# Altium PCB FDDplus3.PcbDoc
Units mm, origin at the board's own origin, x right, y up, seen from the top; angles counter-clockwise.
Board outline 101.85 x 73.66 mm, 2 copper layers (Top, Bottom), stack 1.67 mm thick; 38 components, 96 nets, 309 pads, 29 vias.
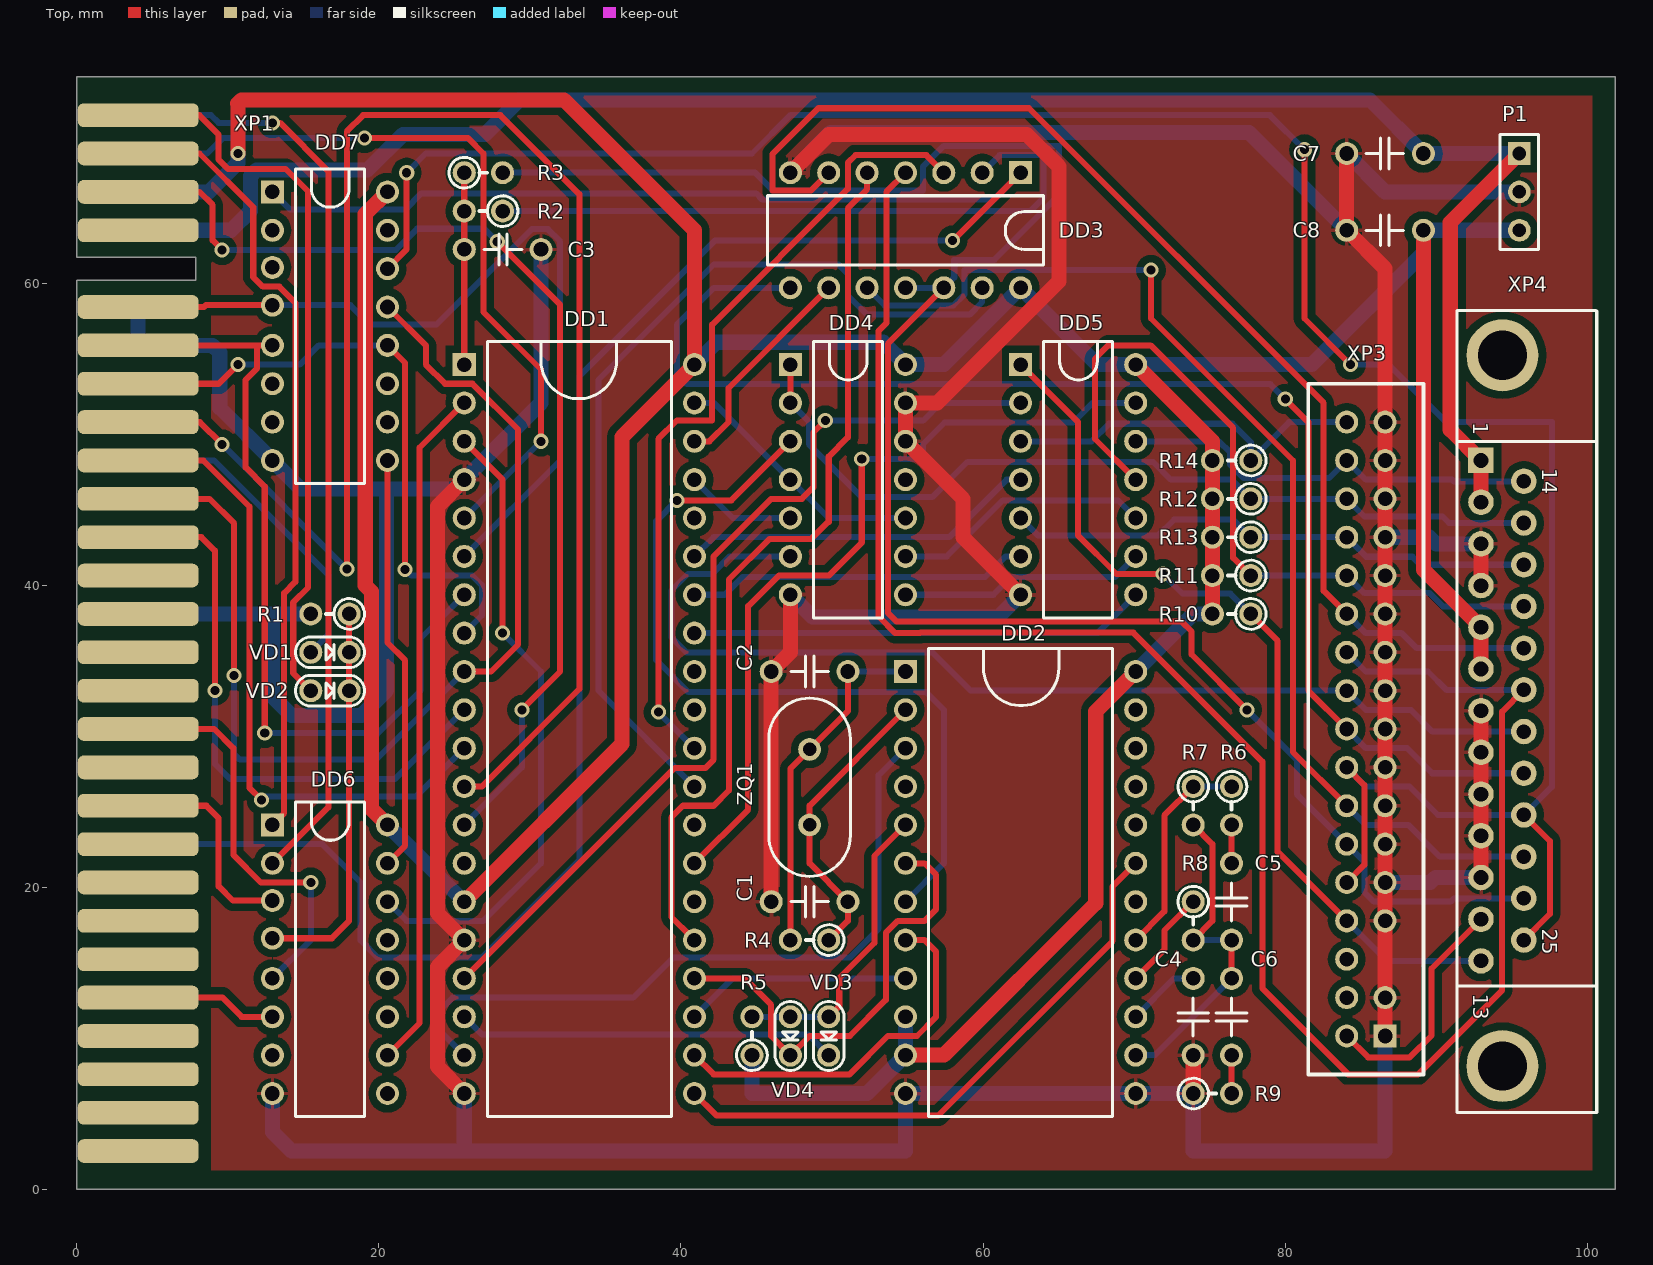
[diagram p0: Top view]
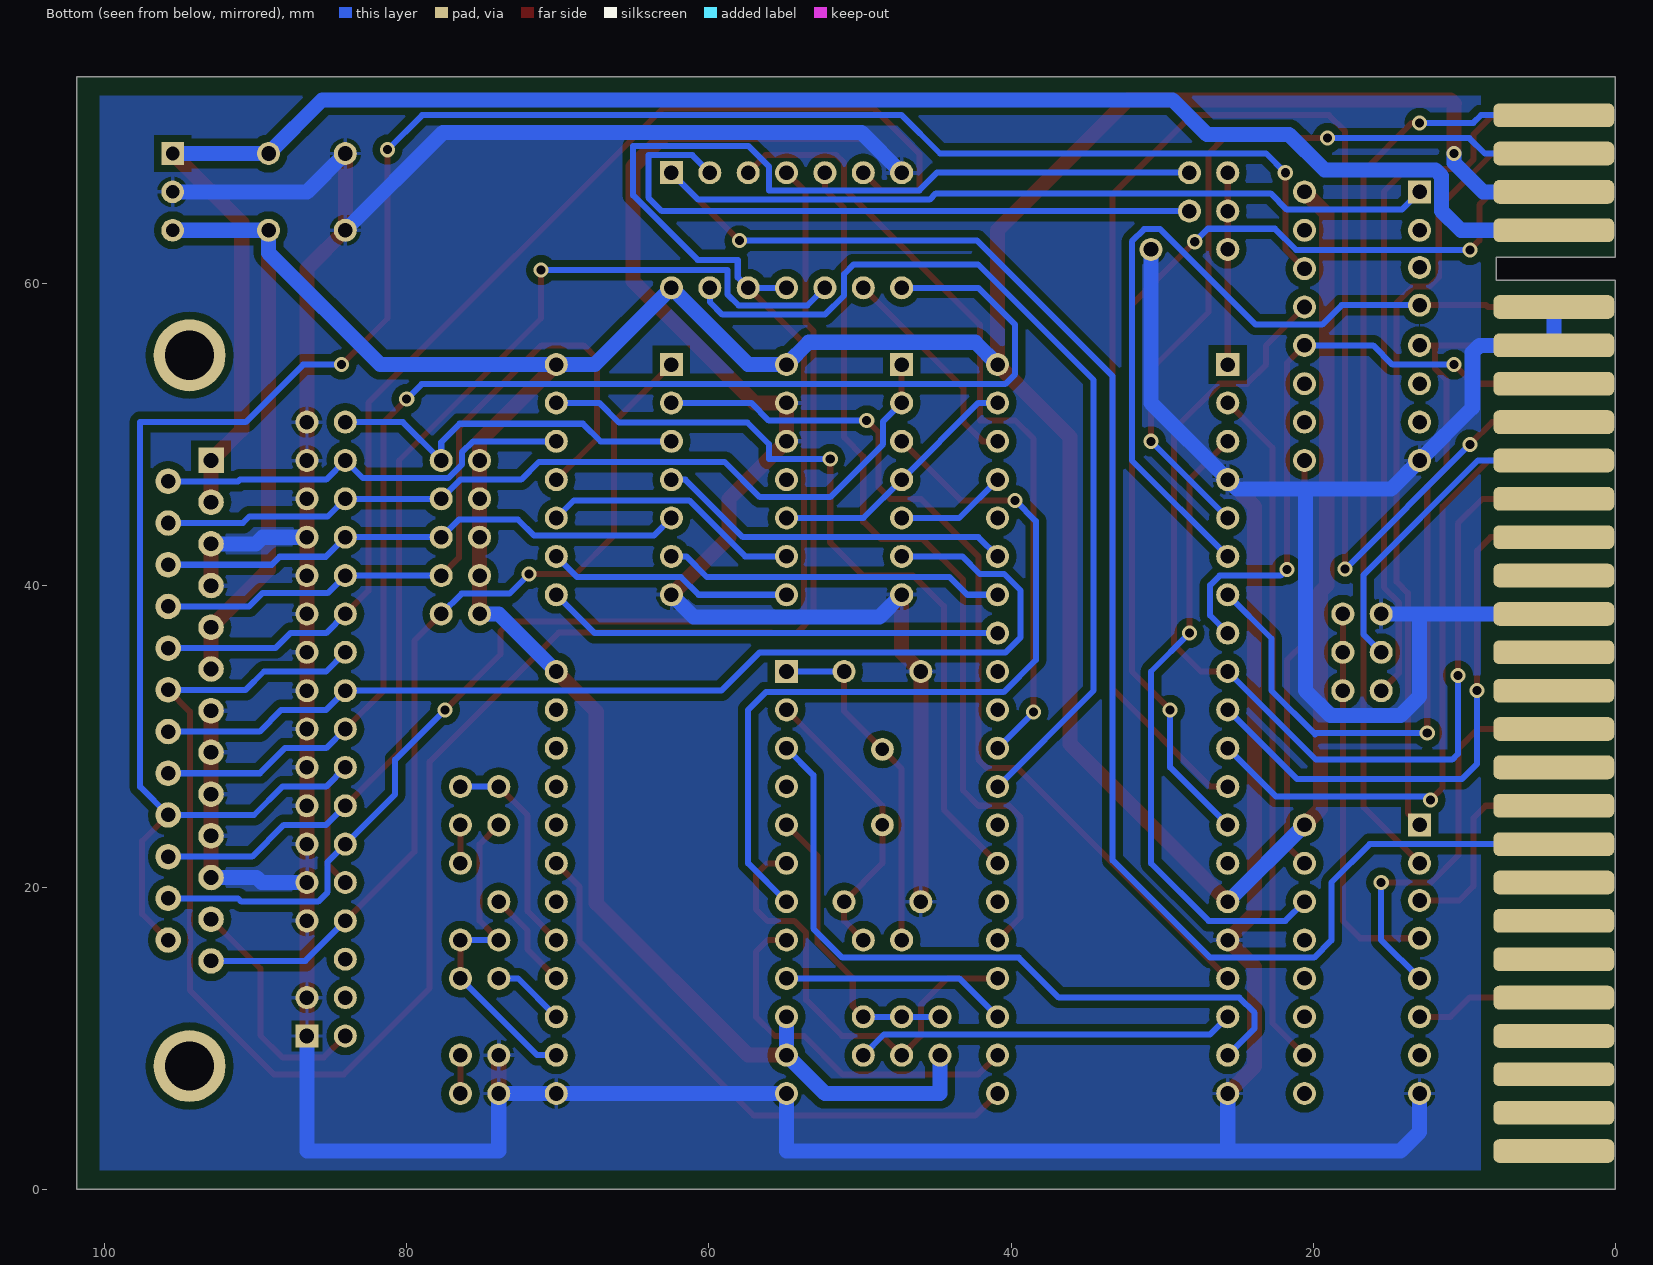
[diagram p1: Bottom view, seen from below]

## Layer stack, top to bottom
Top Solder: solder mask 0.01, Solder Resist, Dk 3.5
Top: signal copper 0.035
Dielectric 1: dielectric 1.6, FR-4, Dk 4.8
Bottom: signal copper 0.035
Bottom Solder: solder mask 0.01, Solder Resist, Dk 3.5

## Board outline
0,0 101.854,0 101.854,73.66 0,73.66 0,61.722 7.874,61.722 7.874,60.198 0,60.198

## Design rules (kind name [scope] priority, off if disabled: settings)
Clearance [All] p1: gap=0.2 except(0.5: Arc-Poly Track-Poly SMDPad-Poly THPad-Poly Via-Poly Fill-Poly Poly-Poly)
ComponentClearance DG126 [HasFootprint('DG126') vs HasFootprint('DG126')] p1: gap=-1 collisioncheckmode=3 verticalgap=0.2 showdistances=FALSE
ComponentClearance [All] p2: gap=0.3 collisioncheckmode=3 verticalgap=0.2 showdistances=FALSE
HoleSize [All] p1: absolutevalues=TRUE maxlimit=6.3 minlimit=0.2 maxpercent=80.000 minpercent=20.000
HoleToHoleClearance [All] p1: gap=0.4 allowstackedmicrovias=TRUE
MinimumSolderMaskSliver [All] p1: minsoldermaskwidth=0.1
PlaneConnect Via_Plane_Connect [(ObjectKind = 'Via')] p1: planeconnectstyle=Direct reliefexpansion=0.508 reliefentries=4 reliefconductorwidth=0.254 reliefairgap=0.254
PlaneConnect [All] p2: planeconnectstyle=Relief reliefexpansion=0.508 reliefentries=4 reliefconductorwidth=0.254 reliefairgap=0.254
PolygonConnect Via_Poly_Connect [(ObjectKind = 'Via')] p1: connectstyle=Direct reliefconductorwidth=0.254 reliefentries=4 polygonreliefangle="90 Angle" airgapwidth=0.254
PolygonConnect [All] p2: connectstyle=Relief reliefconductorwidth=0.254 reliefentries=4 polygonreliefangle="90 Angle" airgapwidth=0.254
RoutingVias [All] p1: holewidth=0.6 width=1 viastyle="Through Hole" minholewidth=0.3 minwidth=0.6 maxholewidth=1.6 maxwidth=2
SilkToSilkClearance [All] p1: silktosilkclearance=0.1
SilkToSolderMaskClearance [IsPad] p1: minsilkscreentomaskgap=0.1 clearancetoexposedcopper=TRUE
SolderMaskExpansion [All] p1: expansion=0.102
Width Width_2 [InNet('GND')] p1: maxlimit=1 minlimit=1 preferedwidth=1
Width [InNet('+5V')] p2: maxlimit=1 minlimit=1 preferedwidth=1
Width Width_3 [InNet('+12V')] p3: maxlimit=1 minlimit=1 preferedwidth=1
Width Width_1 [All] p4: maxlimit=0.4 minlimit=0.4 preferedwidth=0.4
23 further rules are at their usual default settings.

## Components (designator, comment, footprint, x,y, rotation, side; value= is the part's Value field where it differs from the comment)
C1 "K10-17_75" K10-17_75 51.054,19.05 r180 top
C2 "K10-17_75" K10-17_75 51.054,34.29 r180 top
C3 "K10-17_75" K10-17_75 30.734,62.23 r180 top
C4 "K10-17_75" K10-17_75 73.914,8.89 r90 top
C5 "K10-17_75" K10-17_75 76.454,16.51 r90 top
C6 "K10-17_75" K10-17_75 76.454,8.89 r90 top
C7 "K10-17_75" K10-17_75 84.074,68.58 r0 top
C8 "K10-17_75" K10-17_75 84.074,63.5 r0 top
DD1 "UPD765" DIP40_15 25.654,54.61 r0 top
DD2 "SED9420" DIP24_15 54.864,34.29 r0 top
DD3 "1533LN1" DIP14 62.484,67.31 r270 top
DD4 "1533LA3" DIP14 47.244,54.61 r0 top
DD5 "1533LN1" DIP14 62.484,54.61 r0 top
DD6 "1533ID7" DIP16 12.954,24.13 r0 top
DD7 "1533TM8" DIP16 12.954,66.04 r0 top
P1 "Power" HDR1X3 95.504,68.58 r270 top
R1 "R0125-2_5" R0125-2_5 15.494,38.1 r0 top
R2 "R0125-2_5" R0125-2_5 25.654,64.77 r0 top
R3 "R0125-2_5" R0125-2_5 28.194,67.31 r180 top
R4 "R0125-2_5" R0125-2_5 47.244,16.51 r0 top
R5 "R0125-2_5" R0125-2_5 44.704,11.43 r270 top
R6 "R0125-2_5" R0125-2_5 76.454,24.13 r90 top
R7 "R0125-2_5" R0125-2_5 73.914,24.13 r90 top
R8 "R0125-2_5" R0125-2_5 73.914,16.51 r90 top
R9 "R0125-2_5" R0125-2_5 76.454,6.35 r180 top
R10 "R0125-2_5" R0125-2_5 75.184,38.1 r0 top
R11 "R0125-2_5" R0125-2_5 75.184,40.64 r0 top
R12 "R0125-2_5" R0125-2_5 75.184,45.72 r0 top
R13 "R0125-2_5" R0125-2_5 75.184,43.18 r0 top
R14 "R0125-2_5" R0125-2_5 75.184,48.26 r0 top
VD1 "KD522-2_5" KD522-2_5 15.494,35.56 r0 top
VD2 "KD522-2_5" KD522-2_5 15.494,33.02 r0 top
VD3 "KD522-2_5" KD522-2_5 49.784,11.43 r270 top
VD4 "KD522-2_5" KD522-2_5 47.244,11.43 r270 top
XP1 "ZX EDGE" ZX_EDGE 4.064,71.12 r0 top
XP3 "FDD_CON" FDD_CON_Male 86.614,10.16 r180 top
XP4 "FDD_DB25" DSUB1.385-2H25A 92.964,48.26 r270 top
ZQ1 "RK169MD" RK169MD 48.514,24.13 r90 top

## Footprints (in the part's own frame and the unit in brackets; to place one, negate y for a bottom-side part, rotate by r counter-clockwise, add the part's x,y. Pads: shape width x height; smd on the part's side, far side on the other; paste and mask are expansions set on the pad)
DIP14 [mil]
  rect 60x60 hole 38: 1(0,0)
  round 60 hole 38: 2(0,-100) 3(0,-200) 4(0,-300) 5(0,-400) 6(0,-500) 7(0,-600) 8(300,-600) 9(300,-500) 10(300,-400) 11(300,-300) 12(300,-200) 13(300,-100) 14(300,0)
  silkscreen extent 60,-660 240,60
DIP16 [mil]
  rect 60x60 hole 38: 1(0,0)
  round 60 hole 38: 2(0,-100) 3(0,-196.85) 4(0,-295.28) 5(0,-400) 6(0,-500) 7(0,-600) 8(0,-700) 9(300,-700) 10(300,-600) 11(300,-500) 12(300,-400) 13(300,-300) 14(300,-200) 15(300,-100) 16(300,0)
  silkscreen extent 60,-760 240,60
DIP24_15 [mil]
  rect 60x60 hole 38: 1(0,0)
  round 60 hole 38: 2(0,-100) 3(0,-200) 4(0,-300) 5(0,-400) 6(0,-500) 7(0,-600) 8(0,-700) 9(0,-800) 10(0,-900) 11(0,-1000) 12(0,-1100) 13(600,-1100) 14(600,-1000) 15(600,-900) 16(600,-800) 17(600,-700) 18(600,-600) 19(600,-500) 20(600,-400) 21(600,-300) 22(600,-200) 23(600,-100) 24(600,0)
  silkscreen extent 60,-1160 540,60
DIP40_15 [mil]
  rect 60x60 hole 38: 1(0,0)
  round 60 hole 38: 2(0,-100) 3(0,-200) 4(0,-300) 5(0,-400) 6(0,-500) 7(0,-600) 8(0,-700) 9(0,-800) 10(0,-900) 11(0,-1000) 12(0,-1100) 13(0,-1200) 14(0,-1300) 15(0,-1400) 16(0,-1500) 17(0,-1600) 18(0,-1700) 19(0,-1800) 20(0,-1900) 21(600,-1900) 22(600,-1800) 23(600,-1700) 24(600,-1600) 25(600,-1500) 26(600,-1400) 27(600,-1300) 28(600,-1200) 29(600,-1100) 30(600,-1000) 31(600,-900) 32(600,-800) 33(600,-700) 34(600,-600) 35(600,-500) 36(600,-400) 37(600,-300) 38(600,-200) 39(600,-100) 40(600,0)
  silkscreen extent 60,-1960 540,60
DSUB1.385-2H25A [mm] "Connector; D Subminiature; 25 Position; Right Angle; Pitch 1.385 mm"
  rect 1.69x1.69 hole 0.965: 1(0,0)
  round 1.69 hole 0.965: 2(2.761,0) 3(5.522,0) 4(8.283,0) 5(11.044,0) 6(13.805,0) 7(16.566,0) 8(19.327,0) 9(22.088,0) 10(24.849,0) 11(27.61,0) 12(30.371,0) 13(33.132,0) 14(1.38,2.84) 15(4.142,2.84) 16(6.902,2.84) 17(9.664,2.84) 18(12.424,2.84) 19(15.185,2.84) 20(17.947,2.84) 21(20.707,2.84) 22(23.469,2.84) 23(26.23,2.84) 24(28.99,2.84) 25(31.752,2.84)
  round 4.76 hole 3.26: 26(-6.96,1.42) 27(40.092,1.42)
  silkscreen extent -9.93,-1.58 43.17,7.67
FDD_CON_Male [mil]
  rect 60x60 hole 37.99: 1(0,0)
  round 60 hole 37.99: 2(100,0) 3(0,-100) 4(100,-100) 6(100,-200) 7(0,-300) 8(100,-300) 9(0,-400) 10(100,-400) 11(0,-500) 12(100,-500) 13(0,-600) 14(100,-600) 15(0,-700) 16(100,-700) 17(0,-800) 18(100,-800) 19(0,-900) 20(100,-900) 21(0,-1000) 22(100,-1000) 23(0,-1100) 24(100,-1100) 25(0,-1200) 26(100,-1200) 27(0,-1300) 28(100,-1300) 29(0,-1400) 30(100,-1400) 31(0,-1500) 32(100,-1500) 33(0,-1600) 34(100,-1600)
  silkscreen extent -100,-1700 200,100
HDR1X3 [mm] "Connector; Header; 3 Position"
  rect 1.5x1.5 hole 0.9: 1(0,0)
  round 1.5 hole 0.9: 2(2.54,0) 3(5.08,0)
  silkscreen extent -1.27,-1.27 6.35,1.27
K10-17_75 [mil]
  round 60 hole 38: 1(0,0) 2(200,0)
  silkscreen extent 50,-40 148,40
KD522-2_5 [mil]
  round 60 hole 38: 1(0,0) 2(100,0)
  silkscreen extent -40,-40 140,40
R0125-2_5 [mil]
  round 60 hole 38: 1(0,0) 2(100,0)
  silkscreen extent 40,-40 140,40
RK169MD [mm]
  round 1.5 hole 0.9: 1(0,0) 2(5,0)
  silkscreen extent -3.4,-2.7 8.4,2.7
ZX_EDGE [mm]
  rrect50% 8x1.57 smd far side: 1(0,0) 2(0,-2.54) 3(0,-5.08) 4(0,-7.62) 6(0,-12.7) 7(0,-15.24) 8(0,-17.78) 9(0,-20.32) 10(0,-22.86) 11(0,-25.4) 12(0,-27.94) 13(0,-30.48) 14(0,-33.02) 15(0,-35.56) 16(0,-38.1) 17(0,-40.64) 18(0,-43.18) 19(0,-45.72) 20(0,-48.26) 21(0,-50.8) 22(0,-53.34) 23(0,-55.88) 24(0,-58.42) 25(0,-60.96) 26(0,-63.5) 27(0,-66.04) 28(0,-68.58)
  rrect50% 8x1.57 smd: 29(0,0) 30(0,-2.54) 31(0,-5.08) 32(0,-7.62) 34(0,-12.7) 35(0,-15.24) 36(0,-17.78) 37(0,-20.32) 38(0,-22.86) 39(0,-25.4) 40(0,-27.94) 41(0,-30.48) 42(0,-33.02) 43(0,-35.56) 44(0,-38.1) 45(0,-40.64) 46(0,-43.18) 47(0,-45.72) 48(0,-48.26) 49(0,-50.8) 50(0,-53.34) 51(0,-55.88) 52(0,-58.42) 53(0,-60.96) 54(0,-63.5) 55(0,-66.04) 56(0,-68.58)

## Part data
P1: library part "Header 3", "Header, 3-Pin"

## Via types
v1: diameter 1, hole 0.6, Top to Bottom, 29 vias

## Nets (pads, with @x,y where several pads share a name; then routed paths per layer and width w, separated by ;. In a path a pad name is that pad's centre, name@x,y a point inside that pad or via, vN(x,y) a via of type N, cw(c..) or ccw(c..) an arc to the next point about the centre after c; other vN are vias at no path point)
1FFD: DD6.15 DD7.9 | length 27.6
  Top w0.4: DD6.15 21.742,22.758 21.742,35.027 20.574,36.195 DD7.9
+5V: C8.2 DD1.15 DD1.40 DD2.10 DD2.11 DD2.24 DD3.14 DD4.14 DD5.14 DD6.16 DD7.16 P1.3 R5.2 R10.1 R11.1 R12.1 R13.1 R14.1 XP1.3 XP4.5 XP4.6 | length 316.3
  Top w1: 10.655,71.895 10.897,72.136 32.258,72.136 40.894,63.5 DD1.40 36.093,49.809 36.093,29.489 DD1.15 ; v1(10.668,68.58) 10.668,71.882 ; DD6.16 19.507,25.197 19.507,39.573 19.101,39.98 19.101,64.567 DD7.16 ; DD2.11 54.866,8.892 57.406,8.892 67.462,18.948 67.462,31.648 DD2.24 ; DD2.10@54.866,11.428 DD2.10@54.866,11.432 ; DD5.14 75.184,49.53 R14.1 R12.1 R13.1 R11.1 R10.1 ; C8.2 89.154,41.026 XP4.5 XP4.6
  Bottom w1: XP1.3 8.743,66.04 10.668,67.965 v1(10.668,68.58) ; DD6.16 DD1.15 ; DD1.40 42.367,56.083 53.391,56.083 DD4.14 57.404,54.61 DD3.14 67.564,54.61 DD5.14 81.76,54.61 89.154,62.004 C8.2 P1.3 ; R5.2 44.704,6.35 52.324,6.35 DD2.11 DD2.10 ; DD2.24 73.914,38.1 R10.1
+12V: C7.2 P1.1 XP1.4 XP4.1 XP4.2 | length 123.7
  Top w1: XP4.2 XP4.1 90.932,50.292 90.932,64.008 P1.1
  Bottom w1: XP1.4 10.211,63.5 11.492,64.781 11.492,67.092 11.902,67.502 19.242,67.502 21.59,69.85 27.028,69.85 29.314,72.136 85.598,72.136 C7.2 P1.1
+12VB22: XP1.50
-12V: XP1.51
A0: XP1.9
A1: VD1.1 XP1.10 | length 21.3
  Bottom w0.4: XP1.10 9.093,48.26 16.662,40.691 16.662,36.728 VD1.1
A2: XP1.11
A3: XP1.12
A4: XP1.24
A5: XP1.23
A6: XP1.22
A7: XP1.21
A8: XP1.54
A9: XP1.27
A10: XP1.55
A11: XP1.28
A12: DD1.5 XP1.2 | length 51.5
  Top w0.4: v1(19.05,69.596) 25.908,69.596 26.924,68.58 26.924,58.09 30.734,54.28 v1(30.734,49.53)
  Bottom w0.4: XP1.2 8.636,68.58 9.652,69.596 v1(19.05,69.596) ; DD1.5 v1(30.734,49.53)
A13: DD6.1 XP1.30 | length 52.4
  Top w0.4: XP1.30 8.128,68.58 11.684,65.024 11.684,60.401 12.319,59.766 13.411,59.766 14.478,58.699 14.478,40.218 13.732,39.472 13.732,24.908 DD6.1
A14: DD6.2 XP1.1 | length 61.5
  Top w0.4: DD6.2 16.656,25.292 16.656,67.418 13.462,70.612 v1(12.954,70.612)
  Bottom w0.4: XP1.1 8.89,71.12 9.398,70.612 v1(12.954,70.612)
A15: VD2.1 XP1.29 | length 48.3
  Top w0.4: XP1.29 8.111,71.12 9.381,69.85 9.381,68.194 10.01,67.564 13.818,67.564 15.316,66.066 15.316,39.852 14.332,38.868 14.332,34.182 VD2.1
BUSAK: XP1.26
BUSRQ: XP1.19
CLKB: XP1.8
D0: DD1.6 DD7.4 XP1.34 | length 55
  Top w0.4: XP1.34 8.433,58.42 8.553,58.54 DD7.4
  Bottom w0.4: DD7.4 18.117,58.54 19.406,57.252 23.801,57.252 30.127,63.578 31.19,63.578 32.004,62.763 32.004,48.26 DD1.6
D1: DD1.7 DD7.5 XP1.35 | length 54.5
  Top w0.4: XP1.35 DD7.5 ; 11.938,55.88 11.938,54.356 11.176,53.594 11.176,47.803 12.446,46.533 v1(12.446,30.226)
  Bottom w0.4: v1(12.446,30.226) 19.761,30.226 19.863,30.124 22.758,33.02 22.758,36.474 DD1.7
D2: DD1.8 DD7.12 XP1.36 | length 42
  Top w0.4: XP1.36 9.398,53.34 v1(10.668,54.61) ; DD7.12 21.742,54.712 v1(21.742,41.046)
  Bottom w0.4: v1(10.668,54.61) 14.757,54.61 16.027,55.88 DD7.12 ; v1(21.742,41.046) 22.149,40.64 26.187,40.64 26.822,40.005 26.822,37.998 DD1.8
D3: DD1.9 DD7.13 XP1.39 | length 71.4
  Top w0.4: XP1.39 8.788,45.72 10.414,44.094 v1(10.414,34.036) ; DD7.13 23.114,55.88 23.114,54.61 24.384,53.34 26.187,53.34 29.21,50.317 29.21,36.068 27.432,34.29 DD1.9
  Bottom w0.4: v1(10.414,34.036) 10.414,28.829 10.795,28.448 19.812,28.448 DD1.9
D4: DD1.10 XP1.40 | length 38.4
  Top w0.4: XP1.40 8.255,43.18 9.144,42.291 v1(9.144,33.02)
  Bottom w0.4: v1(9.144,33.02) 9.144,28.169 10.135,27.178 21.082,27.178 DD1.10
D5: DD1.11 XP1.38 | length 43.2
  Top w0.4: XP1.38 8.382,48.26 11.43,45.212 11.43,26.594 v1(12.243,25.781)
  Bottom w0.4: v1(12.243,25.781) 12.462,26 22.444,26 DD1.11
D6: DD1.12 XP1.37 | length 107.9
  Top w0.4: XP1.37 8.153,50.8 v1(9.627,49.327) ; v1(17.882,41.072) 17.882,70.048 18.954,71.12 28.042,71.12 33.274,65.888 33.274,33.13 26.815,26.67 DD1.12
  Bottom w0.4: v1(9.627,49.327) v1(17.882,41.072)
D7: DD1.13 XP1.31 | length 70.6
  Top w0.4: XP1.31 8.128,66.04 8.992,65.176 8.992,62.84 v1(9.627,62.205) ; v1(27.838,62.738) 32.004,58.572 32.004,34.29 v1(29.464,31.75)
  Bottom w0.4: v1(9.627,62.205) 21.133,62.205 22.53,63.602 26.975,63.602 v1(27.838,62.738) ; DD1.13 29.464,27.94 v1(29.464,31.75)
F_DIR: DD3.8 XP3.18 XP4.21 | length 89.2
  Top w0.4: v1(80.01,52.324) 81.534,50.8 81.534,33.02 XP3.18
  Bottom w0.4: DD3.8 42.164,59.69 39.726,57.252 39.726,53.975 40.386,53.315 79.019,53.315 v1(80.01,52.324) ; XP3.18 85.344,29.21 88.074,29.21 89.732,27.553 XP4.21
F_DS0: DD7.14 XP3.10 XP3.16 XP4.22 XP4.25 | length 157.4
  Top w0.4: DD7.14 21.844,62.23 v1(21.844,67.31) ; v1(81.28,68.834) 81.28,57.658 v1(84.328,54.61) ; XP3.10 85.242,21.488 85.242,26.772 XP3.16 ; XP4.25 97.536,18.241 97.536,23.059 XP4.22
  Bottom w0.4: v1(21.844,67.31) 23.114,68.58 44.704,68.58 47.244,71.12 78.994,71.12 v1(81.28,68.834) ; XP3.16 85.344,26.67 88.242,26.67 90.12,24.791 XP4.22 97.663,26.651 97.663,50.8 90.678,50.8 86.868,54.61 v1(84.328,54.61)
F_DS1: DD3.11 DD3.12 R3.1 XP3.12 XP4.24 | length 132.7
  Top w0.4: DD3.12 53.696,55.982 53.696,38.171 54.275,37.592 73.152,37.592 73.806,36.938 73.806,35.414 v1(77.47,31.75)
  Bottom w0.4: R3.1 44.914,67.31 46.076,66.148 56.032,66.148 56.032,67.735 57.369,69.072 65.024,69.072 65.024,65.816 60.749,61.54 58.094,61.54 58.094,60.38 DD3.12 DD3.11 ; v1(77.47,31.75) 80.772,28.448 80.772,26.162 XP3.12 85.242,21.692 85.242,19.685 85.877,19.05 90.957,19.05 91.177,19.27 XP4.24
F_DS2: DD3.10 XP3.14 XP4.23 | length 75.1
  Top w0.4: v1(71.12,60.858) 71.12,57.658 80.518,48.26 80.518,28.956 XP3.14
  Bottom w0.4: DD3.10 53.492,58.522 58.039,58.522 58.776,59.258 58.776,60.858 v1(71.12,60.858) ; XP3.14 85.344,24.13 88.138,24.13 90.238,22.031 XP4.23
F_DS3: XP3.6
F_INDEX: DD5.1 R10.2 XP3.8 XP4.13 | length 59.4
  Top w0.4: DD5.1 66.294,50.8 66.294,43.282 68.834,40.742 v1(71.907,40.742) ; R10.2 79.502,36.322 79.502,22.352 XP3.8
  Bottom w0.4: v1(71.907,40.742) 73.203,39.446 76.378,39.446 R10.2 ; XP3.8 86.726,15.128 XP4.13
F_MODE: XP3.2 XP4.12 | length 15.9
  Top w0.4: XP3.2 85.496,8.738 88.24,8.738 89.687,10.185 89.687,14.612 XP4.12
F_RD: DD4.1 DD4.2 R12.2 XP3.30 XP4.15 | length 57.2
  Top w0.4: DD4.2 DD4.1
  Bottom w0.4: DD4.2 48.465,50.849 48.465,49.342 51.979,45.828 56.626,45.828 58.956,48.158 71.266,48.158 72.434,46.99 76.454,46.99 R12.2 XP3.30 85.242,44.552 90.424,44.552 90.857,44.119 XP4.15
F_READY: DD5.3 R14.2 XP3.34 | length 24.8
  Bottom w0.4: DD5.3 67.18,49.53 68.342,50.692 76.5,50.692 77.724,49.468 R14.2 80.264,50.8 XP3.34
F_SIDE: DD5.12 XP3.32 XP4.14 | length 28.2
  Bottom w0.4: DD5.12 75.616,49.53 76.352,48.793 76.352,47.988 77.249,47.092 82.906,47.092 XP3.32 85.344,46.99 91.059,46.99 91.17,46.88 XP4.14
F_STEP: DD4.6 XP3.20 XP4.20 | length 70.9
  Bottom w0.4: DD4.6 43.231,41.91 42.062,40.742 40.462,40.742 39.37,39.649 39.37,36.551 40.361,35.56 56.642,35.56 59.182,33.02 XP3.20 85.344,31.75 88.316,31.75 89.752,30.314 XP4.20
F_TR00: DD5.11 R11.2 XP3.26 XP4.17 | length 50.1
  Top w0.4: DD5.11 67.412,49.682 67.412,54.991 68.301,55.88 71.095,55.88 76.556,50.419 76.556,41.808 R11.2
  Bottom w0.4: R11.2 XP3.26 85.242,39.472 89.56,39.472 90.436,38.596 XP4.17
F_WD: DD3.4 XP3.22 XP4.19 | length 128.3
  Top w0.4: DD3.4 53.594,66.04 53.594,57.353 53.086,56.845 53.086,37.933 54.189,36.83 55.831,36.83 55.86,36.859 69.948,36.859 78.486,28.321 78.486,13.31 84.176,7.62 88.798,7.62 94.361,13.183 94.361,31.632 XP4.19
  Bottom w0.4: XP3.22 85.344,34.29 89.459,34.29 90.674,33.075 XP4.19
F_WG: DD3.6 XP3.24 XP4.18 | length 94.3
  Top w0.4: DD3.6 48.616,66.142 46.076,66.142 46.076,68.555 49.098,71.577 63.043,71.577 82.55,52.07 ; 82.55,39.624 82.55,52.07 ; 82.55,39.624 82.55,52.07 ; 82.55,39.624 XP3.24 82.55,39.624
  Bottom w0.4: XP3.24 85.344,36.83 87.706,36.83 88.701,35.836 XP4.18
F_WP: DD5.5 R13.2 XP3.28 XP4.16 | length 35.5
  Bottom w0.4: DD5.5 63.652,43.282 71.577,43.282 72.644,44.348 76.556,44.348 R13.2 XP3.28 85.369,41.885 88.417,41.885 88.945,41.358 XP4.16
GND: C1.2 C2.2 C3.1 C4.1 C7.1 C8.1 DD1.4 DD1.16 DD1.20 DD2.12 DD2.13 DD3.7 DD4.7 DD4.12 DD4.13 DD5.7 DD6.8 DD7.8 P1.2 R1.1 R9.2 XP1.6 XP1.7 XP1.14 XP3.1 XP3.3 XP3.7 XP3.9 XP3.11 XP3.13 XP3.15 XP3.17 XP3.19 XP3.21 XP3.23 XP3.25 XP3.27 XP3.29 XP3.31 XP3.33 XP4.3 XP4.4 XP4.7 XP4.8 XP4.9 XP4.10 XP4.11 | length 465.9
  Top w1: DD1.20 23.876,8.128 23.876,14.732 DD1.16 23.876,18.288 23.876,45.212 DD1.4 ; C1.2 C2.2 47.244,35.56 DD4.7 ; DD3.7 49.784,69.85 62.89,69.85 65.024,67.716 65.024,60.122 56.972,52.07 DD4.13 DD4.12 58.674,45.72 58.674,43.18 DD5.7 ; R9.2 C4.1 ; C7.1 C8.1 86.614,60.96 XP3.33 XP3.31 XP3.29 XP3.27 XP3.25 XP3.23 XP3.21 XP3.19 XP3.17 XP3.15 XP3.13 XP3.11 XP3.9 XP3.7 XP3.3 XP3.1 ; XP4.11 XP4.10 XP4.9 XP4.8 XP4.7 ; XP4.4 XP4.3
  Bottom w1: XP1.14 R1.1 ; XP1.6 XP1.7 8.985,55.88 9.468,55.397 9.468,51.746 DD7.8 14.834,46.38 25.044,46.38 DD1.4 30.734,52.07 C3.1 ; DD6.8 12.954,3.81 14.224,2.54 25.654,2.54 ; 12.954,38.1 12.954,32.639 14.224,31.369 18.847,31.369 20.498,33.02 20.498,46.38 ; DD4.7 48.717,37.897 61.011,37.897 DD5.7 ; DD3.7 49.906,69.972 77.602,69.972 C8.1 ; C7.1 86.614,66.04 P1.2 ; XP3.1 86.614,2.54 73.914,2.54 R9.2 DD2.13 DD2.12 54.864,2.54 25.654,2.54 ; XP3.9 89.611,20.32 89.941,20.65 XP4.11 ; XP3.27 89.56,43.18 90.002,42.738 XP4.3 ; 25.654,2.54 DD1.20 25.654,2.54
HALT: XP1.43
HC1: XP1.48
INT: XP1.41
IORQ: DD6.5 XP1.45 | length 27.2
  Top w0.4: XP1.45 9.093,30.48 10.363,29.21 10.363,22.149 12.192,20.32 v1(15.494,20.32)
  Bottom w0.4: DD6.5 15.494,16.51 v1(15.494,20.32)
IRQULA: XP1.13
M1: DD6.6 XP1.52 | length 9.4
  Top w0.4: XP1.52 9.652,12.7 10.922,11.43 DD6.6
MREQ: XP1.44
NetC1_1: C1.1 DD2.2 R4.2 ZQ1.1 | length 19.4
  Top w0.4: R4.2 51.054,17.78 C1.1 48.514,21.59 ZQ1.1 48.514,25.4 DD2.2
NetC2_1: C2.1 DD2.1 R4.1 ZQ1.2 | length 23.2
  Top w0.4: R4.1 47.244,27.86 ZQ1.2 51.054,31.67 C2.1
  Bottom w0.4: C2.1 DD2.1
NetC3_2: C3.2 DD1.1 R2.1 R3.2 | length 12.7
  Top w0.4: DD1.1 C3.2 R2.1 R3.2
NetC4_2: C4.2 DD2.15 | length 4.9
  Bottom w0.4: DD2.15 72.644,13.97 C4.2
NetC5_1: C5.1 C6.2 DD2.14 R7.1 R8.1 | length 22.2
  Top w0.4: R8.1 75.184,17.78 75.184,22.86 R7.1 ; C6.2 C5.1
  Bottom w0.4: DD2.14 71.374,8.89 C6.2 ; R8.1 C5.1
NetC5_2: C5.2 R6.1 | length 2.5
  Top w0.4: C5.2 R6.1
NetC6_1: C6.1 R9.1 | length 2.5
  Top w0.4: R9.1 C6.1
NetDD1_2: DD1.2 DD6.10 | length 45.3
  Top w0.4: DD6.10 22.692,11.008 22.692,49.108 DD1.2
NetDD1_3: DD1.3 DD6.14 | length 42.3
  Top w0.4: DD1.3 28.194,46.99 v1(28.194,36.83)
  Bottom w0.4: DD6.14 21.844,17.78 26.924,17.78 30.734,21.59 30.734,34.29 v1(28.194,36.83)
NetDD1_17: DD1.17 DD5.2 | length 62.6
  Top w0.4: DD1.17 39.599,27.915 41.631,27.915 42.164,28.448 42.164,41.91 45.974,45.72 48.006,45.72 48.768,46.482 48.768,50.114 v1(49.555,50.902)
  Bottom w0.4: v1(49.555,50.902) 56.032,50.902 57.201,52.07 DD5.2
NetDD1_18: DD1.18 VD3.2 | length 25.2
  Bottom w0.4: DD1.18 26.822,10.262 48.412,10.262 VD3.2
NetDD1_19: DD1.19 DD2.3 | length 47.7
  Bottom w0.4: DD1.19 23.876,10.668 23.876,11.684 24.892,12.7 36.83,12.7 39.478,15.348 51.162,15.348 53.086,17.272 53.086,27.432 DD2.3
NetDD1_21: DD1.21 DD2.19 | length 38.8
  Top w0.4: DD1.21 42.342,4.902 57.048,4.902 68.58,16.434 68.58,20.066 DD2.19
NetDD1_22: DD1.22 DD2.8 | length 24.8
  Top w0.4: DD1.22 42.164,7.62 51.162,7.62 53.702,10.16 55.626,10.16 56.896,11.43 56.896,15.748 56.134,16.51 DD2.8
NetDD1_23: DD1.23 DD2.9 | length 15
  Bottom w0.4: DD1.23 43.434,13.97 DD2.9
NetDD1_24: DD1.24 DD2.6 VD4.2 | length 30.5
  Top w0.4: DD1.24 44.221,13.97 45.974,12.217 45.974,10.16 VD4.2 48.514,10.16 51.181,10.16 53.569,12.548 53.569,16.993 54.356,17.78 56.134,17.78 56.896,18.542 56.896,20.828 56.134,21.59 DD2.6
NetDD1_25: DD1.25 DD3.5 | length 59.5
  Top w0.4: DD1.25@40.64,16.51 40.64,16.764 39.37,18.034 39.37,24.638 40.132,25.4 42.164,25.4 43.18,26.416 43.18,40.386 45.866,43.072 48.622,43.072 49.746,44.196 49.784,44.196 49.784,48.514 51.054,49.784 51.054,64.948 52.324,66.218 DD3.5
NetDD1_27: DD1.27 DD5.13 | length 53.5
  Top w0.4: DD1.27 44.45,25.146 44.45,38.608 46.482,40.64 49.784,40.64 51.968,42.824 v1(51.968,48.368)
  Bottom w0.4: v1(51.968,48.368) 56.032,48.368 56.032,49.352 57.455,50.775 65.964,50.775 67.259,52.07 DD5.13
NetDD1_29: DD1.29 DD3.13 | length 61.6
  Bottom w0.4: DD1.29 34.544,33.02 34.544,53.594 42.189,61.239 50.419,61.239 51.054,60.604 51.054,59.182 52.324,57.912 59.106,57.912 59.944,58.75 DD3.13
NetDD1_30: DD1.30 DD3.3 | length 53.4
  Top w0.4: v1(38.506,31.598) 38.506,49.689 39.726,50.908 42.062,50.908 42.062,57.252 51.054,66.243 51.054,67.97 51.556,68.472 56.242,68.472 DD3.3
  Bottom w0.4: v1(38.506,31.598) DD1.30
NetDD1_33: DD1.33 DD5.8 | length 30.3
  Bottom w0.4: DD1.33 67.564,36.83 DD5.8
NetDD1_34: DD1.34 DD5.6 | length 22.6
  Bottom w0.4: DD1.34 42.892,39.37 44.061,40.538 60.128,40.538 61.5,41.91 DD5.6
NetDD1_35: DD1.35 DD5.4 | length 23.7
  Bottom w0.4: DD1.35 42.164,43.18 57.76,43.18 61.57,46.99 DD5.4
NetDD1_37: DD1.37 DD4.5 | length 7.4
  Bottom w0.4: DD1.37 43.434,44.45 DD4.5
NetDD1_38: DD1.38 DD3.9 | length 14.4
  Top w0.4: DD1.38 41.878,49.53 43.148,50.8 43.148,53.054 DD3.9
NetDD1_39: DD1.39 DD4.4 DD4.10 | length 17.1
  Bottom w0.4: DD1.39 42.164,52.07 DD4.4 49.784,44.45 DD4.10
NetDD2_5: DD2.5 R5.1 VD3.1 VD4.1 | length 19.9
  Top w0.4: VD3.1 50.481,12.127 50.481,13.997 52.816,16.332 52.816,22.082 DD2.5
  Bottom w0.4: R5.1 VD4.1 VD3.1
NetDD2_7: DD2.7 DD4.3 | length 54.4
  Top w0.4: v1(39.726,45.618) 43.332,45.618 DD4.3
  Bottom w0.4: v1(39.726,45.618) 38.354,44.247 38.354,35.052 40.488,32.918 56.236,32.918 57.404,31.75 57.404,21.59 DD2.7
NetDD2_16: DD2.16 R8.2 | length 6.7
  Top w0.4: DD2.16 72.009,15.875 72.009,17.145 R8.2
NetDD2_17: DD2.17 R6.2 R7.2 | length 14.3
  Top w0.4: DD2.17 72.009,18.415 72.009,24.765 R7.2
  Bottom w0.4: R7.2 R6.2
NetDD3_2: DD3.2 R2.2 | length 43.5
  Bottom w0.4: R2.2 63.119,64.77 64.008,65.659 64.008,68.472 61.106,68.472 DD3.2
NetDD4_8: DD4.8 DD5.9 | length 16.3
  Bottom w0.4: DD4.8 60.687,39.37 61.849,40.532 68.726,40.532 DD5.9
NetDD4_9: DD4.9 DD5.10 | length 17.3
  Bottom w0.4: DD4.9 57.607,41.91 61.316,45.618 68.936,45.618 DD5.10
NetDD6_4: DD6.4 R1.2 VD1.2 VD2.2 | length 25.9
  Top w0.4: DD6.4 16.884,16.63 18.034,17.78 VD2.2 VD1.2 R1.2
NMI: XP1.42
RD: XP1.46
RESET: DD3.1 DD7.1 XP1.20 | length 155.4
  Top w0.4: v1(57.988,62.814) DD3.1
  Bottom w0.4: XP1.20 16.256,22.86 18.796,20.32 18.796,16.485 19.939,15.342 26.822,15.342 33.274,21.793 33.274,53.848 42.24,62.814 v1(57.988,62.814) ; DD7.1 14.122,64.872 21.742,64.872 22.809,65.938 44.983,65.938 45.39,65.532 60.706,65.532 DD3.1
RFSH: XP1.53
ROMCS: XP1.25
WAIT: XP1.49
WR: DD6.3 XP1.47 | length 14.1
  Top w0.4: XP1.47 8.585,25.4 9.398,24.587 9.398,20.066 10.334,19.13 DD6.3
pads on no net: DD1.14 DD1.26 DD1.28 DD1.31 DD1.32 DD1.36 DD2.4 DD2.18 DD2.20 DD2.21 DD2.22 DD2.23 DD4.11 DD6.7 DD6.9 DD6.11 DD6.12 DD6.13 DD7.2 DD7.3 DD7.6 DD7.7 DD7.10 DD7.11 DD7.15 XP1.15 XP1.16 XP1.17 XP1.18 XP1.32 XP1.56 XP3.4 XP4.26 XP4.27

## Polygon pours and split planes (outlines as drawn)
GND on Bottom "Top-No Net" (solid, pour order 4): 8.89,72.39 100.33,72.39 100.33,1.27 8.89,1.27
GND on Top "Top-No Net" (solid, pour order 6): 8.89,72.39 100.33,72.39 100.33,1.27 8.89,1.27

## Silkscreen, mask and mechanical layers (free items; w line width, h text height)
Outline:
  lines w0.254: 101.854,73.66 0,73.66 0,61.722 7.874,61.722 7.874,60.198 0,60.198 0,0 101.854,0 101.854,73.66 ; 101.854,73.66 101.854,73.66

## Text inside footprints (layer, text, board x,y; h text height)
XP4: Top Overlay "25" at 97.028,17.272 h1 r270; Top Overlay "14" at 97.028,47.752 h1 r270; Top Overlay "13" at 92.456,12.954 h1 r270; Top Overlay "1" at 92.456,50.8 h1 r270